# EAGLE board VentingSysPCB (EAGLE 9.6.1)
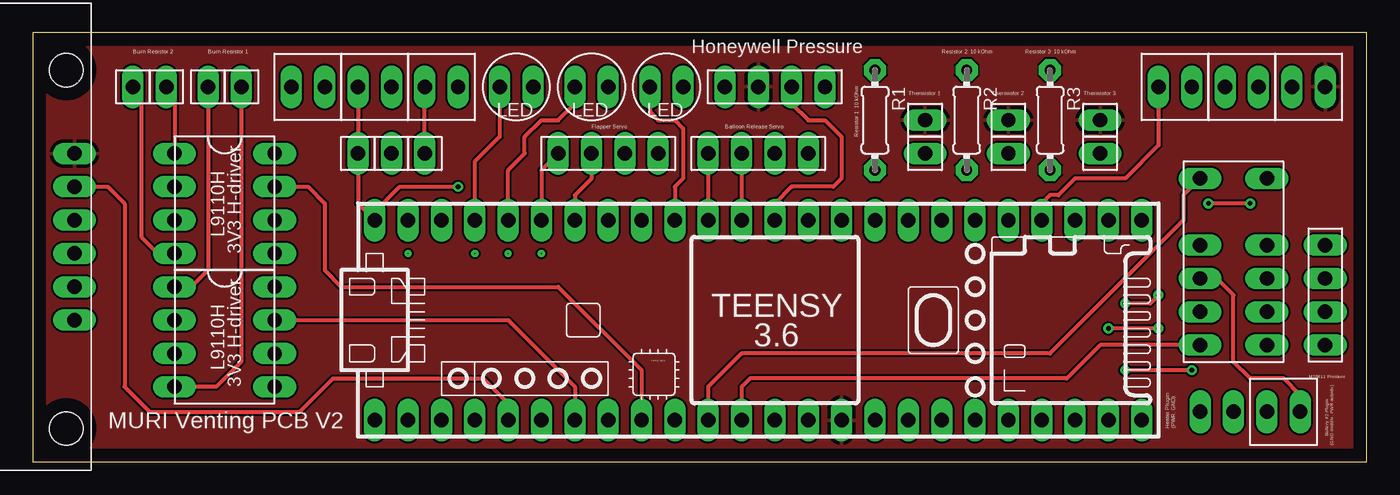
[diagram p0: board, top side]
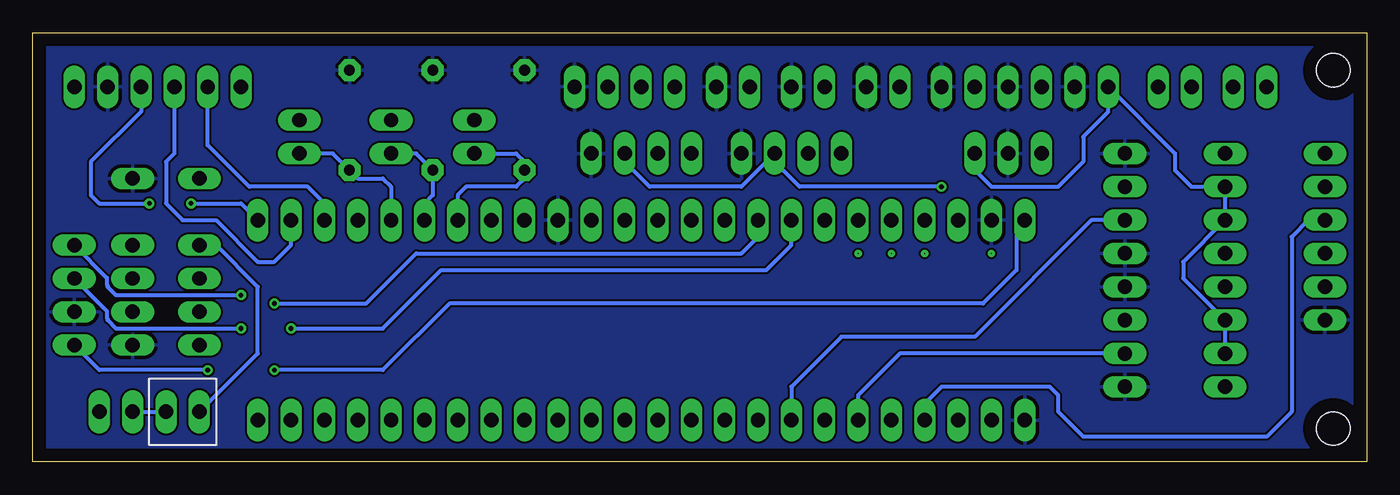
[diagram p1: board, bottom side, seen from below]

Size 101.58 x 32.69 mm. Coordinates in mm from the lower left corner, seen from the top.
Outline: 0,0 101.58,0 101.58,32.69 0,32.69 0,0
Copper layers (1*16): Top 0.035mm / dielectric 1.5mm / Bottom 0.035mm
Design rules "default": minimum track width 6mil, minimum drill 0.35mm, track to track 6mil, track to pad 6mil, pad to pad 6mil, via to via 6mil, smd to smd 6mil, copper to edge 40mil, drill to drill 6mil, minimum pad ring 10mil, minimum via ring 8mil, stop-mask expansion 4mil, vias tented up to drill 0mil, thermal gap 10mil
Holes 2.54 mm at 2.54,2.54 2.54,29.84

## Footprints (pad centres in the part's own frame; a part is rotated, then mirrored left to right if it is on the bottom)
0204/7 = drill 0.813 pad 1.676 octagon: 1 -3.81,0; 2 3.81,0
MULTIPURPOSE = drill 1.1 long: MP1 0,0
TEENSY_3.5/3.6_BASIC = drill 1.1 long: 0/RX -25.4,-7.62; 1/TX -22.86,-7.62; 2 -20.32,-7.62; 3/CANTX -17.78,-7.62; 3V3 7.62,-7.62; 3V3_LO -22.86,7.62; 4/CANRX -15.24,-7.62; 5 -12.7,-7.62; 6 -10.16,-7.62; 7 -7.62,-7.62; 8 -5.08,-7.62; 9/CS -2.54,-7.62; 10/CS 0,-7.62; 11/MOSI 2.54,-7.62; 12/MISO 5.08,-7.62; 13/SCK 5.08,7.62; 14/A0 2.54,7.62; 15/A1 0,7.62; 16/A2 -2.54,7.62; 17/A3 -5.08,7.62; 18/A4/SDA -7.62,7.62; 19/A5/SCL -10.16,7.62; 20/A6 -12.7,7.62; 21/A7 -15.24,7.62; 21/DAC0 12.7,7.62; 22/A8 -17.78,7.62; 23/A9 -20.32,7.62; 24 10.16,-7.62; 25 12.7,-7.62; 26 15.24,-7.62; 27 17.78,-7.62; 28 20.32,-7.62; 29 22.86,-7.62; 30 25.4,-7.62; 31/A12 27.94,-7.62; 32/A13 30.48,-7.62; 33/A14 30.48,7.62; 34/A15 27.94,7.62; 35/A16 25.4,7.62; 36/A17 22.86,7.62; 37/A18 20.32,7.62; 38/A19 17.78,7.62; 39/A20 15.24,7.62; A22/DAC1 10.16,7.62; AGND -25.4,7.62; GND -27.94,-7.62; GND2 7.62,7.62; VIN -27.94,7.62 | drill 0.051 pad 0.254: A10 -17.78,5.08; A11 -15.24,5.08; AREF -20.32,5.08; VUSB -25.4,5.08
3V3_H-DRIVER = drill 1.1 long: 1/GND -3.81,0; 2/DIN -1.27,0; 3/DIN 1.27,0; 4/GND 3.81,0; 5/RES_OUT1 3.81,7.62; 6/9V 1.27,7.62; 7/9V -1.27,7.62; 8/RES_OUT2 -3.81,7.62
ADAFRUIT_LED = drill 1.1 long: 1/GND -1.27,0; 2/DPIN 1.27,0
EC2-3TNU_LATCH_RELAY = drill 1.1 long: DPIN -2.54,5.08; DPIN2 -2.54,-7.62; GND_BAT1A 2.54,-7.62; GND_BAT1B 2.54,5.08; HEATER_PWR -2.54,0; NC -2.54,-5.08; NC2 2.54,-5.08; NC3 2.54,-2.54; NC4 2.54,0; VCC_BAT2 -2.54,-2.54
FEEDBACK_SERVO = drill 1.1 long: FEEDBACK 3.81,0; GND -3.81,0; PWM 1.27,0; VCC -1.27,0
HONEYWELL_PRESSURE = drill 1.1 long: GND 3.81,0; NC -3.81,0; PSI 1.27,0; VCC -1.27,0
MS5611_PRESSURE = drill 1.1 long: GND 1.27,0; SCL -1.27,0; SDA -3.81,0; VIN_R 3.81,0
TERMINAL_BLOCK = drill 1.1 long: 1/PWR -1.27,0; 2/GND 1.27,0
UBLOX-8-NEO = drill 1.1 long: GND -5.08,0; RX 5.08,0; SCL 0,0; SDA -2.54,0; TX 2.54,0; VCC 7.62,0

## Placement (x,y rotation side)
R1  [0204/7]  64.14,26.04 270 top
R2  [0204/7]  71.12,26.04 270 top
R3  [0204/7]  77.47,26.04 270 top
U$1  MULTIPURPOSE  [MULTIPURPOSE]  29.84,23.5 0 top
U$2  TEENSY_3.5/3.6_BASIC  [TEENSY_3.5/3.6_BASIC]  53.98,10.79 0 top
U$3  MULTIPURPOSE  [MULTIPURPOSE]  27.3,23.5 0 top
U$4  3V3_H-DRIVER  [3V3_H-DRIVER]  18.41,19.68 90 top
U$5  MULTIPURPOSE  [MULTIPURPOSE]  81.28,23.5 270 top
U$6  3V3_H-DRIVER  [3V3_H-DRIVER]  18.41,9.53 90 top
U$7  ADAFRUIT_LED  [ADAFRUIT_LED]  48.26,28.57 180 top
U$8  MULTIPURPOSE  [MULTIPURPOSE]  24.77,23.5 0 top
U$10  MULTIPURPOSE  [MULTIPURPOSE]  81.28,26.04 270 top
U$12  ADAFRUIT_LED  [ADAFRUIT_LED]  42.55,28.57 180 top
U$13  ADAFRUIT_LED  [ADAFRUIT_LED]  36.83,28.57 180 top
U$14  MULTIPURPOSE  [MULTIPURPOSE]  74.3,23.5 90 top
U$15  MULTIPURPOSE  [MULTIPURPOSE]  74.3,26.04 90 top
U$16  EC2-3TNU_LATCH_RELAY  [EC2-3TNU_LATCH_RELAY]  91.44,16.51 0 top
U$17  FEEDBACK_SERVO  [FEEDBACK_SERVO]  55.24,23.5 180 top
U$18  HONEYWELL_PRESSURE  [HONEYWELL_PRESSURE]  56.52,28.57 0 top
U$19  MS5611_PRESSURE  [MS5611_PRESSURE]  98.42,12.7 270 top
U$20  MULTIPURPOSE  [MULTIPURPOSE]  15.88,28.57 180 top
U$21  MULTIPURPOSE  [MULTIPURPOSE]  13.34,28.57 180 top
U$22  MULTIPURPOSE  [MULTIPURPOSE]  7.62,28.57 180 top
U$23  MULTIPURPOSE  [MULTIPURPOSE]  10.16,28.57 180 top
U$24  TERMINAL_BLOCK  [TERMINAL_BLOCK]  95.25,3.81 180 top
U$25  TERMINAL_BLOCK  [TERMINAL_BLOCK]  90.17,3.81 180 bottom
U$26  TERMINAL_BLOCK  [TERMINAL_BLOCK]  26.04,28.57 0 top
U$27  TERMINAL_BLOCK  [TERMINAL_BLOCK]  31.11,28.57 0 top
U$28  TERMINAL_BLOCK  [TERMINAL_BLOCK]  20.95,28.57 0 top
U$29  UBLOX-8-GPS  [UBLOX-8-NEO]  3.17,15.88 90 top
U$30  FEEDBACK_SERVO  [FEEDBACK_SERVO]  43.81,23.5 180 top
U$31  TERMINAL_BLOCK  [TERMINAL_BLOCK]  97.16,28.57 180 top
U$32  TERMINAL_BLOCK  [TERMINAL_BLOCK]  92.08,28.57 180 top
U$33  TERMINAL_BLOCK  [TERMINAL_BLOCK]  87,28.57 180 top
U$34  MULTIPURPOSE  [MULTIPURPOSE]  67.94,23.5 90 top
U$35  MULTIPURPOSE  [MULTIPURPOSE]  67.94,26.04 90 top

## Library data of the parts
R1-R3 = adafruit
U$1 U$3-U$8 U$10 U$12-U$35 = Venting2.0Libr
U$2 = Teensy356

## Nets
18/A4/SDA: U$2.18/A4/SDA U$19.SDA
19/A5/SCL: U$2.19/A5/SCL U$19.SCL
A0: U$2.14/A0 U$18.PSI
A2: U$2.16/A2 U$17.FEEDBACK
A7: U$2.21/A7 U$30.FEEDBACK
A18: R3.2 U$2.37/A18 U$5.MP1
A19: R2.2 U$2.38/A19 U$14.MP1
A20: R1.2 U$2.39/A20 U$34.MP1
D2: U$2.2 U$29.TX
D3: U$2.3/CANTX U$29.RX
D4: U$2.4/CANRX U$6.2/DIN
D5: U$2.5 U$6.3/DIN
D6: U$2.6 U$4.2/DIN
D7: U$2.7 U$4.3/DIN
D8: U$2.8
D9: U$2.9/CS U$16.DPIN
D10: U$2.10/CS U$16.DPIN2
D11: U$2.11/MOSI
D12: U$2.12/MISO
D15: U$2.15/A1 U$17.PWM
D17: U$2.17/A3 U$7.2/DPIN
D20: U$2.20/A6 U$30.PWM
D22: U$2.22/A8 U$12.2/DPIN
D23: U$2.23/A9 U$13.2/DPIN
D24: U$2.24
D25: U$2.25
D26: U$2.26
D27: U$2.27
D28: U$2.28
D29: U$2.29
D30: U$2.30
D31/A12: U$2.31/A12
D32/A13: U$2.32/A13
D33/A14: U$2.33/A14 U$32.1/PWR
D34/A15: U$2.34/A15 U$32.2/GND
D35/A16: U$2.35/A16 U$33.1/PWR
D36/A17: U$2.36/A17 U$33.2/GND
GND: R1.1 R2.1 R3.1 U$2.AGND U$2.GND U$2.GND2 U$3.MP1 U$4.1/GND U$4.4/GND U$6.1/GND U$6.4/GND U$7.1/GND U$12.1/GND U$13.1/GND U$16.GND_BAT1A U$16.GND_BAT1B U$17.GND U$18.GND U$19.GND U$26.2/GND U$27.2/GND U$28.2/GND U$29.GND U$30.GND U$31.2/GND
GND2: U$24.2/GND U$25.2/GND
HEATER_RED: U$16.HEATER_PWR U$25.1/PWR
R-VIN: U$1.MP1 U$4.6/9V U$4.7/9V U$6.6/9V U$6.7/9V U$27.1/PWR U$28.1/PWR
RES1A: U$6.5/RES_OUT1 U$21.MP1
RES1B: U$6.8/RES_OUT2 U$20.MP1
RES2A: U$4.5/RES_OUT1 U$23.MP1
RES2B: U$4.8/RES_OUT2 U$22.MP1
VCC: U$2.3V3 U$10.MP1 U$15.MP1 U$18.VCC U$29.VCC U$31.1/PWR U$35.MP1
VCC2: U$16.VCC_BAT2 U$24.1/PWR
VIN: U$2.VIN U$8.MP1 U$17.VCC U$19.VIN_R U$26.1/PWR U$30.VCC

## Tracks (layer width: path | path; a pad name or v marks a point on that pad's centre or on a via)
18/A4/SDA  (via drill 0.35)
  Top 0.305: v85.72,12.7 85.09,12.06 v83.19,12.06
  Bottom 0.305: U$19.SDA 95.94,14.02 95.94,13.5 95.89,13.45 95.89,13.34 95.25,12.7 v85.72,12.7 | v83.19,12.06 76.2,12.06 72.39,15.88 47.62,15.88 46.35,17.14 U$2.18/A4/SDA
19/A5/SCL  (via drill 0.35)
  Top 0.305: v85.72,10.16 v81.92,10.16
  Bottom 0.305: U$19.SCL 95.94,11.48 95.94,10.96 95.89,10.91 95.89,10.79 95.25,10.16 v85.72,10.16 | v81.92,10.16 74.93,10.16 70.48,14.61 45.72,14.61 43.81,16.51 U$2.19/A5/SCL
A0
  Top 0.305: U$18.PSI 57.78,27.3 59.05,26.04 60.33,26.04 61.59,24.77 61.59,21.59 60.96,20.95 57.78,20.95 56.52,19.68 U$2.14/A0
A2
  Top 0.305: U$17.FEEDBACK U$2.16/A2
A7
  Top 0.305: U$30.FEEDBACK 38.73,22.23 U$2.21/A7
A18
  Bottom 0.305: U$2.37/A18 74.3,20.95 74.93,21.59 76.83,21.59 R3.2 78.74,23.5 U$5.MP1
A19
  Bottom 0.305: U$2.38/A19 71.75,19.68 71.12,20.32 R2.2 72.39,23.5 U$14.MP1
A20
  Bottom 0.305: U$34.MP1 64.77,23.5 64.14,22.86 R1.2 64.14,21.59 64.77,20.95 68.58,20.95 69.22,20.32 U$2.39/A20
D2
  Bottom 0.305: U$29.TX 4.45,18.41 5.71,17.14 5.71,3.81 7.62,1.91 21.59,1.91 23.5,3.81 23.5,5.08 24.13,5.71 32.38,5.71 33.66,4.45 U$2.2
D3
  Top 0.305: U$2.3/CANTX 36.2,4.45 34.29,6.35 22.86,6.35 20.32,3.81 8.89,3.81 6.99,5.71 6.99,19.68 5.71,20.95 U$29.RX
D4
  Bottom 0.305: U$6.2/DIN 35.56,8.26 38.73,5.08 U$2.4/CANRX
D5
  Top 0.305: U$2.5 41.27,5.71 36.2,10.79 U$6.3/DIN
D6
  Bottom 0.305: U$4.2/DIN 20.95,18.41 29.84,9.53 40.01,9.53 43.81,5.71 U$2.6
D7
  Top 0.305: U$4.3/DIN 20.95,20.95 22.23,19.68 22.23,14.61 23.5,13.34 40.01,13.34 46.35,6.99 U$2.7
D9
  Top 0.305: U$16.DPIN 87.63,20.32 87.63,18.41 77.47,8.26 53.98,8.26 51.44,5.71 U$2.9/CS
D10
  Top 0.305: U$2.10/CS 53.98,5.71 54.61,6.35 78.74,6.35 81.28,8.89 U$16.DPIN2
D15
  Top 0.305: U$17.PWM U$2.15/A1
D17
  Top 0.305: U$7.2/DPIN 46.99,26.67 47.62,26.04 48.9,26.04 49.53,25.4 49.53,21.59 48.9,20.95 U$2.17/A3
D20
  Top 0.305: U$30.PWM 42.55,21.59 41.27,20.32 U$2.20/A6
D22
  Top 0.305: U$2.22/A8 36.2,22.23 37.47,23.5 37.47,24.77 38.73,26.04 40.01,26.04 41.27,27.3 U$12.2/DPIN
D23
  Top 0.305: U$2.23/A9 33.66,22.86 35.56,24.77 U$13.2/DPIN
D33/A14  (via drill 0.35)
  Top 0.305: v92.71,19.68 v89.53,19.68
  Bottom 0.305: U$32.1/PWR 93.34,26.67 97.16,22.86 97.16,20.32 96.52,19.68 v92.71,19.68 | U$2.33/A14 85.72,19.68 v89.53,19.68
D34/A15
  Bottom 0.305: U$2.34/A15 81.92,16.51 83.19,15.24 84.45,15.24 87.63,18.41 90.17,18.41 91.44,19.68 91.44,22.86 90.81,23.5 U$32.2/GND
D35/A16
  Bottom 0.305: U$2.35/A16 79.38,19.68 80.64,20.95 85.09,20.95 88.27,24.13 U$33.1/PWR
D36/A17
  Top 0.305: U$2.36/A17 76.83,19.68 77.47,20.32 78.11,20.32 79.38,21.59 83.19,21.59 85.72,24.13 U$33.2/GND
GND
  pour Bottom: -0.64,-0.64 -0.64,33.66 102.87,33.66 102.87,-1.91 -0.64,-1.91
GND2
  Bottom 0.305: U$24.2/GND U$25.2/GND
HEATER_RED
  Bottom 0.305: U$25.1/PWR 84.45,8.26 84.45,13.34 87.63,16.51 U$16.HEATER_PWR
R-VIN
  Top 0.305: U$1.MP1 U$27.1/PWR
  Bottom 0.305: U$1.MP1 29.84,22.23 28.57,20.95 23.5,20.95 21.59,22.86 21.59,24.77 19.68,26.67 U$28.1/PWR 14.61,23.5 14.61,22.23 13.34,20.95 U$4.6/9V U$4.7/9V 13.97,15.24 13.97,13.97 U$6.6/9V U$6.7/9V
RES1A
  Top 0.305: U$21.MP1 13.34,14.61 12.06,13.34 U$6.5/RES_OUT1
RES1B
  Top 0.305: U$20.MP1 15.88,7.62 13.97,5.71 U$6.8/RES_OUT2
RES2A
  Top 0.305: U$23.MP1 10.79,27.94 U$4.5/RES_OUT1
RES2B
  Top 0.305: U$4.8/RES_OUT2 9.53,15.88 8.26,17.14 8.26,27.94 U$22.MP1
VCC
  pour Top: -1.27,0 -1.27,33.66 102.87,33.66 102.87,-1.91 -1.27,-1.91
VCC2
  Top 0.305: U$24.1/PWR 96.52,5.08 95.25,6.35 92.71,6.35 91.44,7.62 91.44,12.7 90.17,13.97 U$16.VCC_BAT2
VIN  (via drill 0.35)
  Top 0.305: U$26.1/PWR U$8.MP1 24.77,19.68 U$2.VIN 26.04,19.05 27.94,20.95 v32.38,20.95 | v83.19,6.99 v88.27,6.99
  Bottom 0.305: U$2.VIN 26.67,17.78 26.67,14.61 29.21,12.06 69.85,12.06 74.93,6.99 v83.19,6.99 | v88.27,6.99 96.52,6.99 U$19.VIN_R | v32.38,20.95 43.18,20.95 45.09,22.86 U$30.VCC 47.62,20.95 54.61,20.95 56.52,22.86 U$17.VCC

## Text on the board
tNames: Burn Resistor 2 | Burn Resistor 1 | Resistor 2: 10 kOhm | Resistor 3: 10 kOhm | Thermistor 1 | Thermistor 2 | Thermistor 3 | Flapper Servo | Balloon Release Servo | Resistor 1: 10 kOhm | 🙏KB/GB 2/8/24🙏 | MURI Venting PCB V2 | Heater Plugin / (PWR, GND) | Battery #2 Plugin / (GND middle, PWR outside)